# Altium PCB Drone BLDC CNTR V2.PcbDoc
Units mil, origin at the board's own origin, x right, y up, seen from the top; angles counter-clockwise.
Board outline 2830.85 x 3035 mil, 2 copper layers (Top Layer, Bottom Layer); 54 components, 37 nets, 154 pads, 328 vias.
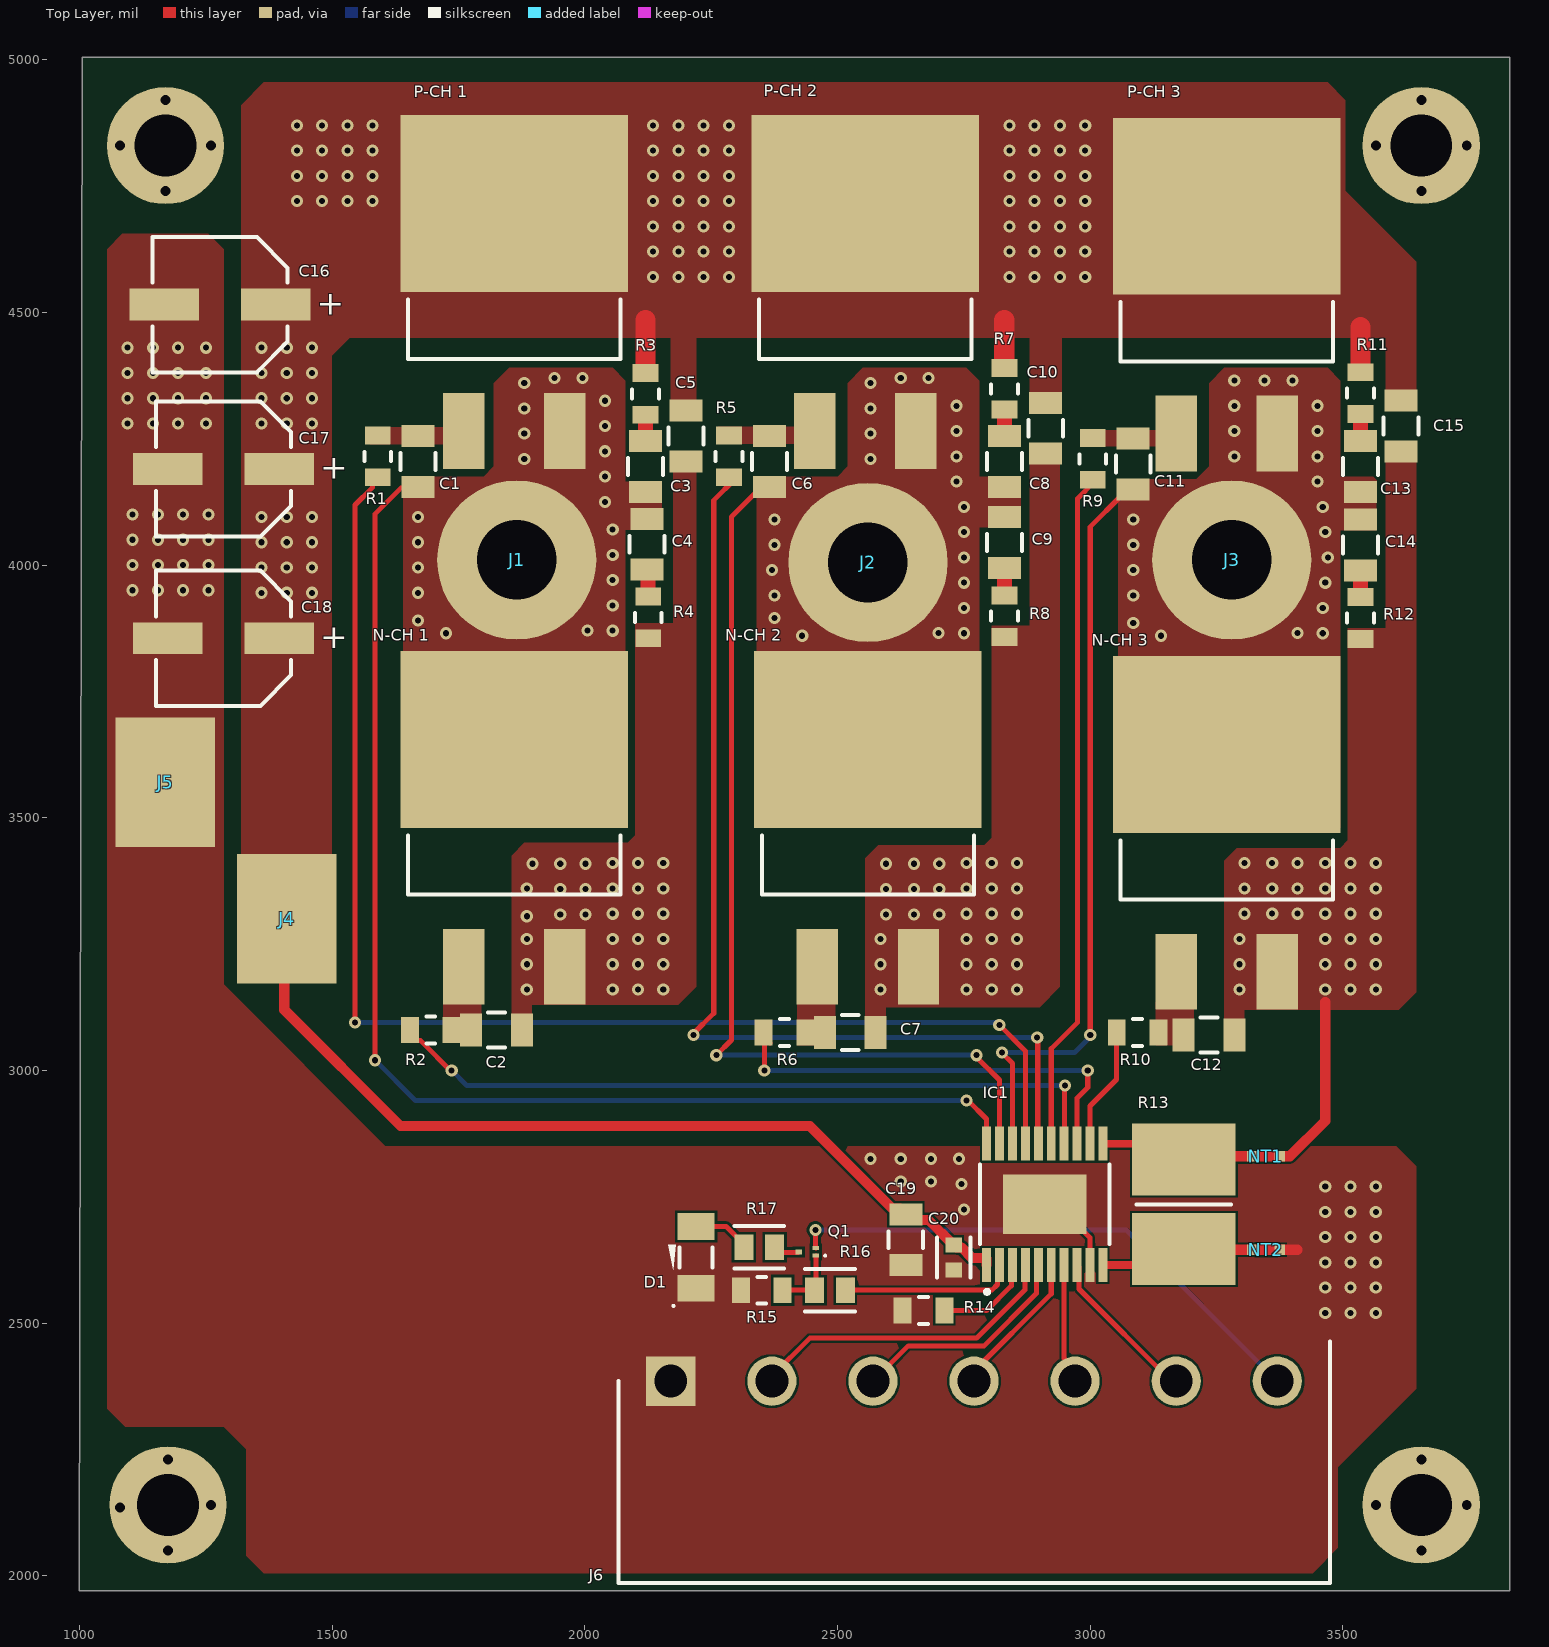
[diagram p0: Top Layer view]
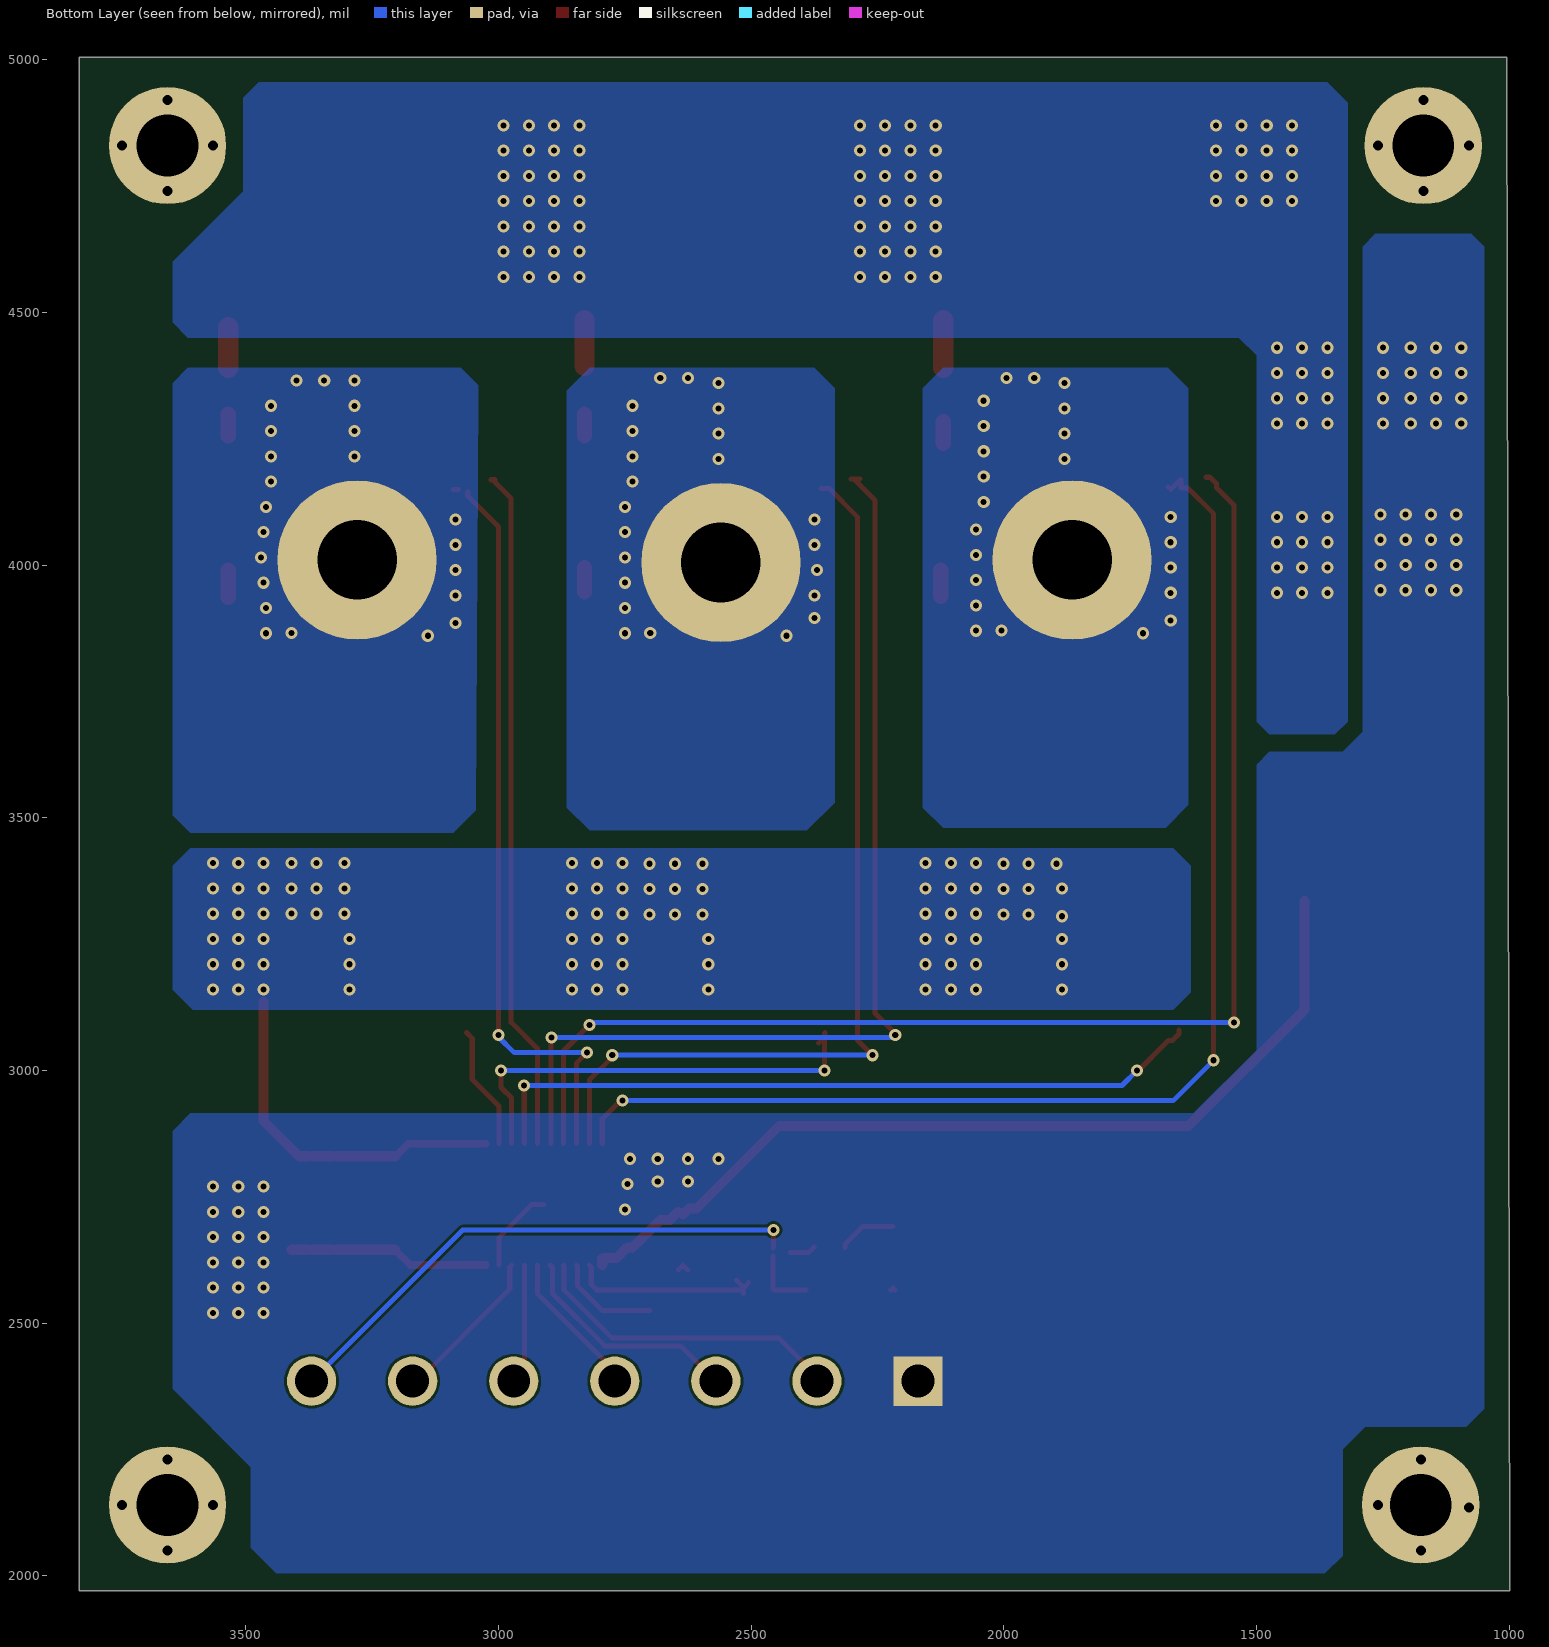
[diagram p1: Bottom Layer view, seen from below]
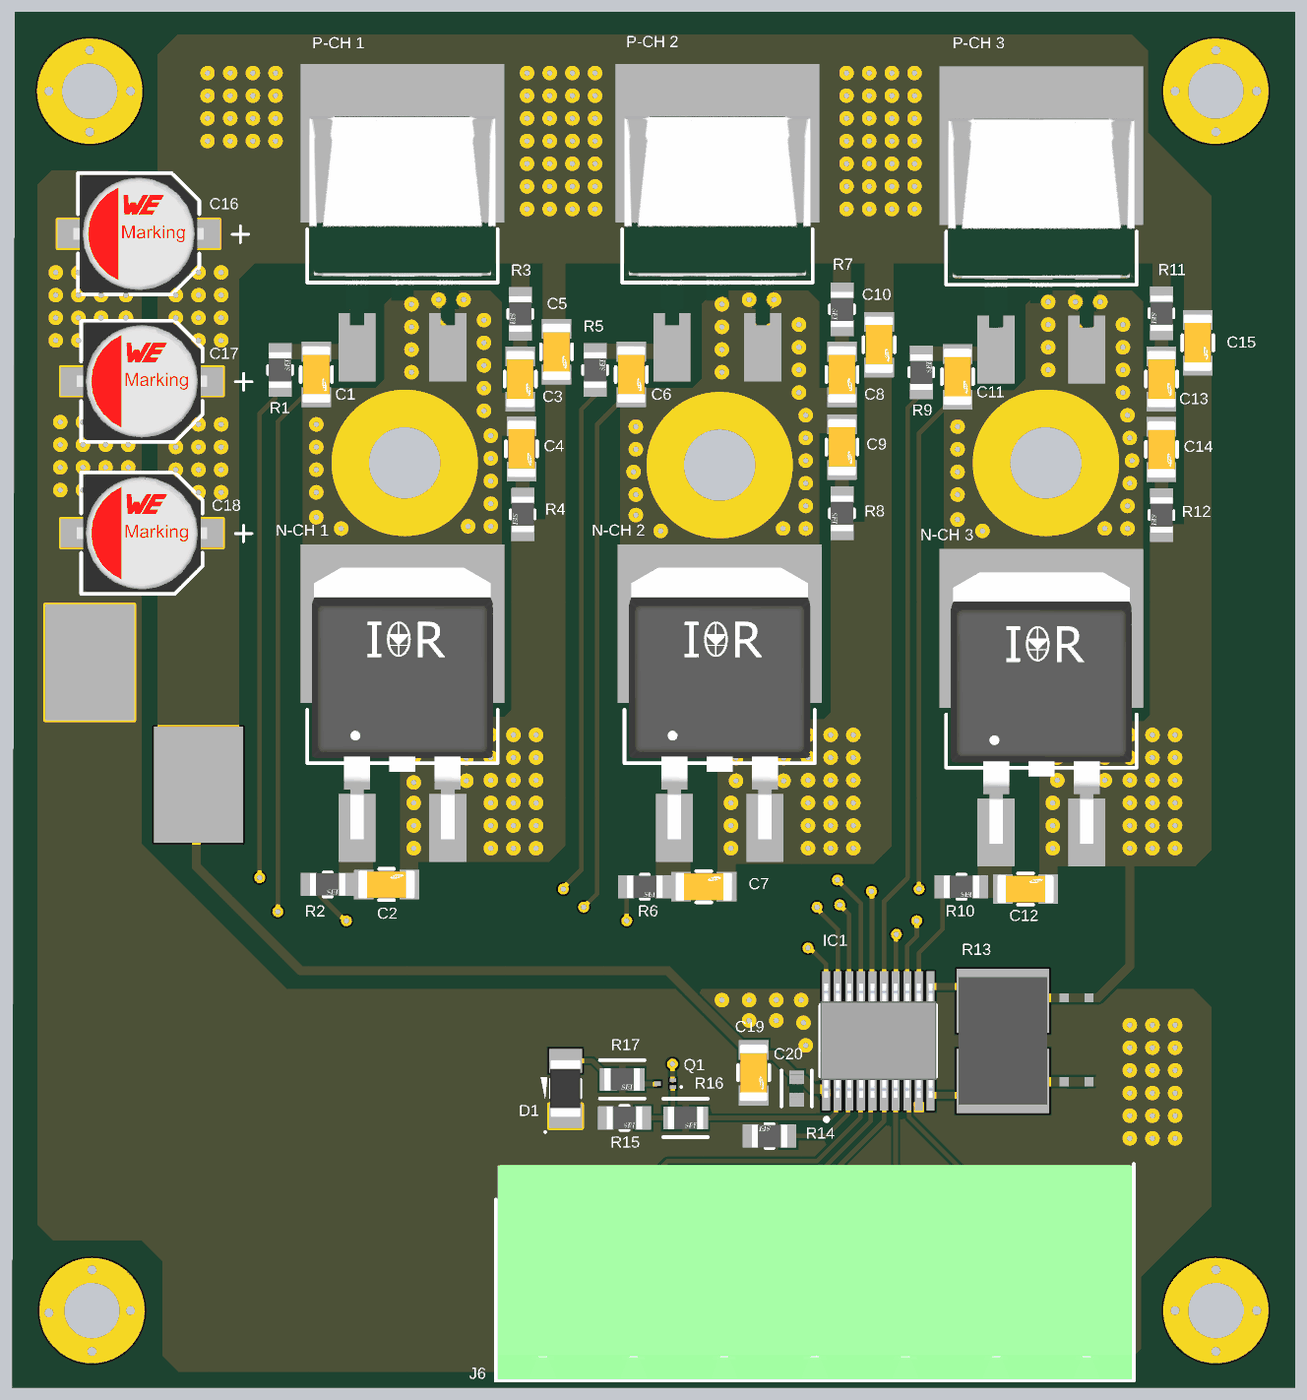
[diagram p2: 3D render of the assembled board from above, using the file's embedded part models]

## Layer stack, top to bottom
Top Solder: solder mask 0.4, Solder Resist, Dk 3.5
Top Layer: signal copper 2.7559
Dielectric 1: dielectric 12.6, FR-4, Dk 4.8
Bottom Layer: signal copper 2.7559
Bottom Solder: solder mask 0.4, Solder Resist, Dk 3.5

## Board outline
1005,5005 3830,5005 3830,1970 999.15,1970

## Design rules (kind name [scope] priority, off if disabled: settings)
Clearance Clearance_1 [All] p1: gap=5 ignorepadtopadclearanceinfootprint=TRUE
Clearance [InNet('SOURCE_LOW') vs InNet('CS_P')] p2: gap=0 ignorepadtopadclearanceinfootprint=TRUE
ComponentClearance [All] p1: gap=1.5 collisioncheckmode=3 verticalgap=10 showdistances=FALSE
DiffPairsRouting [All] p1: maxlimit=10 minlimit=10 mostfreqgap=10 toplayer_minwidth=15 toplayer_maxwidth=20 toplayer_prefwidth=15 bottomlayer_minwidth=15 bottomlayer_maxwidth=20 bottomlayer_prefwidth=15 maxuncoupledlength=500
HoleSize [All] p1: absolutevalues=TRUE maxlimit=160 minlimit=1 maxpercent=80.000 minpercent=20.000
PolygonConnect [All] p1: connectstyle=Direct reliefconductorwidth=10 reliefentries=4 polygonreliefangle="90 Angle" airgapwidth=10
RoutingVias [All] p1: holewidth=28 width=50 viastyle="Through Hole" minholewidth=12 minwidth=24 maxholewidth=157.48 maxwidth=393.7
ShortCircuit [InNet('CS_N') vs InNet('GND')] p1: allowed=TRUE
ShortCircuit ShortCircuit_1 [InNet('SOURCE_LOW') vs InNet('CS_P')] p2: allowed=TRUE
ShortCircuit ShortCircuit_2 [All] p3: allowed=FALSE
SilkToSolderMaskClearance [All] p1: minsilkscreentomaskgap=0 clearancetoexposedcopper=TRUE
SolderMaskExpansion [All] p1: expansion=4 istentingtop=FALSE
SupplyNets "Schematic Supply Nets" [InNet('VDD +5V')] p1: voltage=0.000
SupplyNets "Schematic Supply Nets_2" [InNet('GND')] p2: voltage=0.000
SupplyNets "Schematic Supply Nets_1" [InNet('VBB +22V2')] p3: voltage=0.000
Width [All] p1: maxlimit=40 minlimit=10 preferedwidth=10
25 further rules are at their usual default settings.

## Classes and differential pairs
differential pair CS: +CS_P -CS_N

## Components (designator, comment, footprint, x,y, rotation, side; value= is the part's Value field where it differs from the comment)
C1 "100nF" FP-CL31-IPC_C 1670,4205 r270 top
C2 "100nF" FP-CL31-IPC_C 1825,3080 r0 top
C3 "Placeholder" FP-CL31-IPC_C 2120,4195 r270 top
C4 "Placeholder" FP-CL31-IPC_C 2122.82,4040.95 r270 top
C5 "100nF" FP-CL31-IPC_C 2200,4255 r270 top
C6 "100nF" FP-CL31-IPC_C 2365,4205 r270 top
C7 "100nF" FP-CL31-IPC_C 2525,3075 r0 top
C8 "Placeholder" FP-CL31-IPC_C 2830,4205 r270 top
C9 "Placeholder" FP-CL31-IPC_C 2830,4044.75 r270 top
C10 "100nF" FP-CL31-IPC_C 2911.85,4270.61 r270 top
C11 "100nF" FP-CL31-IPC_C 3085,4200 r270 top
C12 "100nF" FP-CL31-IPC_C 3235,3070 r0 top
C13 "Placeholder" FP-CL31-IPC_C 3535,4195 r270 top
C14 "Placeholder" FP-CL31-IPC_C 3535,4039.75 r270 top
C15 "100nF" FP-CL31-IPC_C 3615,4275 r270 top
C16 "390uF" WCAP-ASLI_D6.3H5.5 1278.02,4515.24 r0 top
C17 "390uF" WCAP-ASLI_D6.3H5.5 1285,4190 r0 top
C18 "390uF" WCAP-ASLI_D6.3H5.5 1285,3855 r0 top
C19 "100nF" FP-CL31-IPC_C 2635,2664.75 r270 top
C20 "10uF" FP-CL10-IPC_C 2730,2630 r270 top
D1 "150120GS75000" 150120GS75000 2220,2630 r90 top
IC1 "A4963GLPTR-T" A4405KLPTRT 2910,2735 r90 top
J1 "1PAD" 1PAD 1865,4010 r0 top
J2 "1PAD" 1PAD 2560,4005 r0 top
J3 "1PAD" 1PAD 3280,4010 r0 top
J4 "1PADREC" 1PADREC 1410,3300 r270 top
J5 "1PADREC" 1PADREC 1170,3570 r270 top
J6 "1759062" SHDRRA7W103P0X508_1X7_3556X1200X872P 2170,2385 r180 top
"N-CH 1" "IRF540NSTRLPBF" FP-PG-TO263-3-MFG#1 1860.08,3480 r0 top
"N-CH 2" "IRF540NSTRLPBF" FP-PG-TO263-3-MFG#1 2560,3480 r0 top
"N-CH 3" "IRF540NSTRLPBF" FP-PG-TO263-3-MFG#1 3270,3470 r0 top
NT1 "NET_TIE" NET_TIE 3345,2830 r90 top
NT2 "NET_TIE" NET_TIE 3345,2645 r90 top
"P-CH 1" "IRF5305STRLPBF" FP-PG-TO263-3-MFG#2 1860,4597.68 r0 top
"P-CH 2" "IRF5305STRLPBF" FP-PG-TO263-3-MFG#2 2555,4597.68 r0 top
"P-CH 3" "IRF5305STRLPBF" FP-PG-TO263-3-MFG#2 3270,4592.68 r0 top
Q1 "NST3906F3T5G" ONSC-SOT-1123-3-524AA_V 2440.09,2640.74 r180 top
R1 "200Ω" FP-RMCF0805-MFG 1590,4215 r90 top
R2 "200Ω" FP-RMCF0805-MFG 1695,3080 r0 top
R3 "Placeholder" FP-RMCF0805-MFG 2120,4338.66 r270 top
R4 "Placeholder" FP-RMCF0805-MFG 2125.45,3896.43 r270 top
R5 "200Ω" FP-RMCF0805-MFG 2285,4215 r90 top
R6 "200Ω" FP-RMCF0805-MFG 2395,3075 r0 top
R7 "Placeholder" FP-RMCF0805-MFG 2830,4348.66 r270 top
R8 "Placeholder" FP-RMCF0805-MFG 2830,3898.66 r270 top
R9 "200Ω" FP-RMCF0805-MFG 3005,4210 r90 top
R10 "200Ω" FP-RMCF0805-MFG 3093.66,3075 r0 top
R11 "Placeholder" FP-RMCF0805-MFG 3535,4340 r270 top
R12 "Placeholder" FP-RMCF0805-MFG 3535,3895 r270 top
R13 "10mΩ" RESC7250X190N 3185,2735 r90 top
R14 "10kΩ" FP-RMCF0805-MFG 2670,2525 r180 top
R15 "10kΩ" FP-RMCF0805-MFG 2350,2565 r0 top
R16 "1kΩ" FP-RMCF0805-IPC_C 2485,2565 r0 top
R17 "1.6kΩ" FP-RMCF0805-IPC_C 2345,2650 r0 top

## Footprints (in the part's own frame and the unit in brackets; to place one, negate y for a bottom-side part, rotate by r counter-clockwise, add the part's x,y. Pads: shape width x height; smd on the part's side, far side on the other; paste and mask are expansions set on the pad)
1PAD [mm] "1 Pad Connector"
  round 8 hole 4: 1(0,0)
1PADREC [mm] "1 Pad Rectangular Connector"
  rect 6.5x5 smd: 1(0,0)
150120GS75000 [mm] "Chip Diode, 2-Leads, Body 3.20x1.60mm, IPC Low Density"
  rect 1.35x1.85 smd: 1(-1.55,0) 2(1.55,0)
  silkscreen extent -2.49,-0.82 0.63,1.4, body extent -1.6,-0.85 1.6,0.85, height 0.78
A4405KLPTRT [mm]
  rect 1.7x0.45 smd: 1(-3.05,2.925) 2(-3.05,2.275) 3(-3.05,1.625) 4(-3.05,0.975) 5(-3.05,0.325) 6(-3.05,-0.325) 7(-3.05,-0.975) 8(-3.05,-1.625) 9(-3.05,-2.275) 10(-3.05,-2.925) 11(3.05,-2.925) 12(3.05,-2.275) 13(3.05,-1.625) 14(3.05,-0.975) 15(3.05,-0.325) 16(3.05,0.325) 17(3.05,0.975) 18(3.05,1.625) 19(3.05,2.275) 20(3.05,2.925)
  rect 3x4.2 smd: 21(0,0)
  silkscreen extent -4.5,-3.25 2,3.25, body extent -3.19,-3.31 3.21,3.29, height 1.04
FP-CL10-IPC_C [mil]
  rect 29.85x31.97 smd paste+0 mask+0: 1(-24.68,0) 2(24.68,0)
  silkscreen extent -40,-33 40,33, body extent -44,-22 44,22, height 10
FP-CL31-IPC_C [mil]
  rect 43.52x65.28 smd paste+0 mask+0: 1(-50.25,0) 2(50.25,0)
  silkscreen extent -17,-34 17,34, body extent -76,-38 76,38, height 10
FP-PG-TO263-3-MFG#1 [mm]
  rect 2.08x3.81 smd paste+0 mask+0: 1(-2.54,-6.985) 3(2.54,-6.985)
  rect 11.43x8.89 smd paste+0 mask+0: 4(0,4.445)
  silkscreen extent -5.34,-3.36 5.34,-0.38, body extent -5.81,-8.99 5.81,8.99, height 0.25
FP-PG-TO263-3-MFG#2 [mm]
  rect 2.08x3.81 smd paste+0 mask+0: 1(-2.54,-8.45) 3(2.54,-8.45)
  rect 11.43x8.89 smd paste+0 mask+0: 4(0,2.98)
  silkscreen extent -5.34,-4.82 5.34,-1.84, body extent -5.81,-10.46 5.81,7.52, height 0.25
FP-RMCF0805-IPC_C [mil]
  rect 37.58x49.69 smd paste+0 mask+0: 1(-30.54,0) 2(30.54,0)
  silkscreen extent -49,-42 49,42, body extent -53,-31 53,31, height 10
FP-RMCF0805-MFG [mm]
  rect 0.9x1.3 smd paste+0 mask+0: 1(-1.05,0) 2(1.05,0)
  silkscreen extent -0.23,-0.67 0.23,0.67, body extent -1.6,-0.77 1.6,0.77, height 0.25
NET_TIE [mil]
  rect 20x20 smd mask-99999: 1(0,-30) 2(0,25)
  Top Layer region: -10,-25 10,-25 10,19.88 -10,19.88
ONSC-SOT-1123-3-524AA_V [mm] "SOT223, 3-Leads, Body 0.8x0.6mm, Pitch 0.38mm"
  rect 0.34x0.2 smd: 1(-0.43,0.19) 2(-0.43,-0.19)
  rect 0.34x0.26 smd: 3(0.43,0)
  silkscreen extent -0.95,0.14 -0.85,0.24, body extent -0.4,-0.3 0.4,0.3, height 0.4
RESC7250X190N [mm]
  rect 3.6x5.2 smd: 1(-2.25,0) 2(2.25,0)
  silkscreen extent 0,-2.37 0,2.37, body extent -3.57,-2.47 3.58,2.48, height 1.65
SHDRRA7W103P0X508_1X7_3556X1200X872P [mm]
  rect 2.475x2.475 hole 1.65: 1(0,0)
  round 2.475 hole 1.65: 2(-5.08,0) 3(-10.16,0) 4(-15.24,0) 5(-20.32,0) 6(-25.4,0) 7(-30.48,0)
  silkscreen extent -33.12,-2 2.64,10.15, body extent -33.02,-1.92 2.54,10.08, height 9.25
WCAP-ASLI_D6.3H5.5 [mm] "Aluminium Electrolytic V-Chip SMT Capacitors, 6.3x5.5mm"
  rect 3.5x1.6 smd: 1(2.8,0) 2(-2.8,0)
  silkscreen extent -3.4,-3.4 3.4,3.4, body extent -3.65,-3.3 3.65,3.3, height 5.5

## Part data
C1 C2 C5 C6 C7 C10 C11 C12 C15 C19: library part CMP-13271-001731-1, "Cap Ceramic 100nF 50V X7R ±10% SMD 1206 +125°C Embossed T/R", Case/Package=1206, Dielectric=X7R, Max Operating Temperature=125°C, Min Operating Temperature=-55°C, Package Quantity=15000, Tolerance=10%, Voltage=50V, Capacitance=100nF, Depth=1.6mm, Height=0.85mm, Lead Free="Lead Free", Length=3.2mm, Mount="Surface Mount", Packaging="Tape and Reel", Radiation Hardening=No, Thickness=0.037inch, Voltage Rating=50V, Voltage Rating (DC)=50V, Width=0.063inch
C3 C4 C8 C9 C13 C14: library part CMP-13271-001731-1, "Cap Ceramic 100nF 50V X7R ±10% SMD 1206 +125°C Embossed T/R", Capacitance=100nF, Case/Package=1206, Dielectric=X7R, Max Operating Temperature=125°C, Min Operating Temperature=-55°C, Package Quantity=15000, Tolerance=10%, Voltage=50V, Depth=1.6mm, Height=0.85mm, Lead Free="Lead Free", Length=3.2mm, Mount="Surface Mount", Packaging="Tape and Reel", Radiation Hardening=No, Thickness=0.037inch, Voltage Rating=50V, Voltage Rating (DC)=50V, Width=0.063inch
C16 C17 C18: library part CMP-03913-53914574-1, "865080343009 WCAP-ASLI Aluminum Electrolytic Capacitors", Capacitance=100µF, Case/Package=Radial, ESR (Equivalent Series Resistance)=399.422mΩ, Insulation Resistance=1MΩ, Leakage Current=16µA, Max Operating Temperature=105°C, Min Operating Temperature=-55°C, Ripple Current=255mA, Tolerance=20%, Voltage Rating=16V, Diameter=6.3mm, Height=5.5mm, Height - Seated (Max)=5.5118mm, Impedance=520mΩ, Lead Free="Lead Free", Length=5.5mm, Life (Hours)=2000hours, Mount="Surface Mount", NexarPartId=53914574, Packaging="Tape & Reel (TR)", Polarity=Polar, REACH SVHC=Unknown, Ripple Current (AC)=255mA, RoHS=Compliant, Voltage Rating (DC)=16V, Width=6.6mm
C20: library part CMP-13271-000193-1, "Cap Ceramic 10nF 50V X7R ±20% Pad SMD 0603 +125°C T/R", Capacitance=10nF, Case Code (Imperial)=0603, Case Code (Metric)=1608, Dielectric=X7R, Max Operating Temperature=125°C, Min Operating Temperature=-55°C, Package Quantity=4000, Tolerance=20%, Voltage Rating=50V, Case/Package=0603, Depth=0.8mm, Height=0.8mm, Lead Free="Lead Free", Length=1.6mm, Mount="Surface Mount", Packaging="Tape and Reel", Radiation Hardening=No, Thickness=0.035inch, Voltage Rating (DC)=50V, Width=0.031inch
D1: library part CMP-036-000001-1, "Green Status LED 1206", ComponentLink1Description=Schematic, ComponentLink1URL=https://katalog.we-online.de/led/datasheet/150120GS75000.pdf, Design Item ID=150120GS75000, Source="LED - Chip.SchLib"
IC1: "Integrated Circuit", Manufacturer_Name="Allegro Microsystems", Mouser Part Number=250-A4963GLPTR-T, Arrow Part Number=A4963GLPTR-T, Arrow Price/Stock=https://www.arrow.com/en/products/a4963glptr-t/allegro-microsystems?region=nac, Datasheet Link=https://www.allegromicro.com/~/media/Files/Datasheets/A4963-Datasheet.ashx, Height=1.2mm, Manufacturer_Part_Number=A4963GLPTR-T, Mouser Price/Stock=https://www.mouser.co.uk/ProductDetail/Allegro-MicroSystems/A4963GLPTR-T?qs=pUKx8fyJudBsbRJaBUG8MA%3D%3D
J1 J2 J3: "1 Pad Connector"
J4 J5: "1 Pad Rectangular Connector"
J6: "Connector", Manufacturer_Name="Phoenix Contact", Mouser Part Number=651-1759062, Arrow Part Number=1759062, Arrow Price/Stock=https://www.arrow.com/en/products/1759062/phoenix-contact, Datasheet Link=http://www.phoenixcontact.com/de/produkte/1759062/pdf, Height=8.72mm, Manufacturer_Part_Number=1759062, Mouser Price/Stock=https://www.mouser.co.uk/ProductDetail/Phoenix-Contact/1759062?qs=cyzODkzcbwDJuRBXr3zqQw%3D%3D
"N-CH 1" "N-CH 2" "N-CH 3": library part CMP-00196-65873407-1, "IRF540NSTRLPBF Transistor MOSFET N Channel 100 Volt 33 Amp 3-Pin 2+ Tab D2pak Tape And Reel", Case/Package=D2PAK, Continuous Drain Current (ID)=33A, Drain to Source Breakdown Voltage=100V, Drain to Source Resistance=44mΩ, Gate to Source Voltage (Vgs)=20V, Input Capacitance=1.96nF, Max Junction Temperature (Tj)=175°C, Max Power Dissipation=3.8W, Min Operating Temperature=-55°C, Package Quantity=800, Resistance=44MΩ, Threshold Voltage=4V, Contact Plating=Tin, Current Rating=33A, Drain to Source Voltage (Vdss)=100V, Dual Supply Voltage=100V, Element Configuration=Single, Fall Time=35ns, Height=4.826mm, Lead Free="Lead Free", Length=10.668mm, Lifecycle Status=NRND, Max Operating Temperature=175°C, Mount="Surface Mount", NexarPartId=65873407, Nominal Vgs=4V, Number Of Channels=1, Number of Elements=1, Number of Pins=3, On-State Resistance=44mΩ, Packaging=Bulk, Power Dissipation=3.8W, Radiation Hardening=No, Rds On Max=8.4mΩ, REACH SVHC="No SVHC", Recovery Time=170ns, Rise Time=35ns, RoHS=Compliant, Schedule B="8541290080, 8541290080", Termination=SMD/SMT, Turn-Off Delay Time=39ns, Turn-On Delay Time=11ns, Voltage Rating (DC)=100V, Width=9.65mm
NT1 NT2: "Net Tie Pad"
"P-CH 1" "P-CH 2" "P-CH 3": library part CMP-32901-000146-1, "MOSFET P-CH 55V 31A D2PAK", Continuous Drain Current=-31A, Drain to Source Breakdown Voltage=-55V, Drain to Source Resistance=0.06Ω, Gate To Source Voltage=20V, Input Capacitace At Vds="1200pF @ -25V", Manufacturer="Infineon Technologies", Max Forward Diode Voltage=-1.3V, Max Junction Temp=+175°C, Package=PG-TO263-3, Power Dissipation=3.8W, Pulse Drain Current=-110A, Temperature="-55°C to +175°C", Temperature Range Low=-55°C, Automotive=No, Category=Trans, ComponentLink2Description=Datasheet, ComponentLink2URL=https://www.infineon.com/dgdl/irf5305spbf.pdf?fileId=5546d462533600a4015355e378101995, Depletion Mode=False, Device Class L1="Discrete Semiconductors", Device Class L2=Transistors, Device Class L3=MOSFETs, Digikey Description="MOSFET P-CH 55V 31A D2PAK", Drain To Source Voltage=-55V, Gate Charge At Vgs="63nC @ -10V", Height=5.084mm, Lead Free=Yes, Manufacturer Part Number=IRF5305STRLPBF, Number Of Channels=1, Number Of P Channels=1, Octopart=https://octopart.com/irf5305strlpbf-infineon-65873398, Reverse Recovery Charge=170nC, Reverse Recovery Time=71ns, RoHS=TRUE, Rthja Max=40°C/W, Standoff Height=0mm, Temperature Range High=+175°C, Threshold Vgs Max=-4V, Threshold Vgs Min=-2V, Turn Off Delay Time=39ns, Turn On Delay Time=14ns
Q1: library part CMP-1048-00442-1, "PNP General Purpose Transistor, 3-Pin SOT-1123, Pb-Free, Tape and Reel", Manufacturer="On Semiconductor", ComponentLink1Description="Manufacturer URL", ComponentLink1URL=http://www.onsemi.com/, ComponentLink2Description=Datasheet, ComponentLink2URL=http://www.onsemi.com/pub_link/Collateral/NST3906F3-D.PDF, ComponentLink3Description="Package Specification", ComponentLink3URL=http://www.onsemi.cn/pub_link/Collateral/524AA.PDF, DatasheetVersion="Rev. 1", fT Min (MHz)=250, IC Continuous (A)=-0.2, Mounting Technology="Surface Mount", PackageDescription="3-Pin Small Outline Transistor, Body 0.8 x 0.6 mm, Pitch 0.375 mm", PackageReference=SOT-1123-3-524AA, PackageVersion="Rev. C, 11/2011", Packing="Tape and Reel", PartNumber=NST3906F3T5G, Polarity=PNP, RoHS=TRUE
R1 R2 R3 R4 R5 R6 R7 R8 R9 R10 R11 R12 R14: library part CMP-26527-000524-1, "200Ω ±1% 0.125W 0805 Thick Film Chip Resistor AEC-Q200 compliant", Case Code (Imperial)=0805, Case Code (Metric)=2012, Max Operating Temperature=155°C, Max Power Dissipation=125mW, Min Operating Temperature=-55°C, Resistance=200R, Resistor Type="Thick Film", Temperature Coefficient=100ppm/°C, Tolerance=1%, Case/Package=0805, Construction=Rectangular, Contact Plating=Tin, Depth=1.25mm, Features="Automotive AEC-Q200", Height=0.026inch, Lead Free="Lead Free", Length=0.079inch, Military Standard=Not, Mount="Surface Mount", Number of Terminations=2, Packaging="Tape and Reel", Power Rating=125mW, Radiation Hardening=No, RoHS Compliant=Yes, Series=RMCF, Size Code=0805, Width=0.049inch
R13: library part HCSM2818FT10L0, "10mΩ 5W Resistor", Manufacturer_Name="Stackpole Electronics", Arrow Part Number=HCSM2818FT10L0, Arrow Price/Stock=https://www.arrow.com/en/products/hcsm2818ft10l0/stackpole-electronics, Datasheet Link=https://cs.seielect.com/catalog/SEI-HCSM.pdf, Height=1.9mm, Manufacturer_Part_Number=HCSM2818FT10L0
R15: library part CMP-26527-000121-1, "RES 10K OHM 1% 1/8W 0805", Case Code (Imperial)=0805, Case Code (Metric)=2012, Max Operating Temperature=155°C, Max Power Dissipation=125mW, Min Operating Temperature=-55°C, Resistance=10kR, Resistor Type="Thick Film", Temperature Coefficient=100ppm/°C, Tolerance=1%, Case/Package=0805, Construction=Rectangular, Contact Plating=Tin, Depth=1.25mm, Features="Automotive AEC-Q200", Height=0.026inch, Lead Free="Lead Free", Length=2mm, Military Standard=Not, Mount="Surface Mount", Number of Terminations=2, Packaging="Tape and Reel", Power Rating=125mW, Radiation Hardening=No, RoHS Compliant=Yes, Series=RMCF, Size Code=0805, Width=0.049inch
R16: library part CMP-26527-002331-1, "1kΩ ±1% 0.125W 0805 Thick Film Chip Resistor AEC-Q200 compliant", Case Code (Imperial)=0805, Case Code (Metric)=2012, Max Operating Temperature=155°C, Max Power Dissipation=125mW, Min Operating Temperature=-55°C, Resistance=1kR, Resistor Type="Thick Film", Temperature Coefficient=100ppm/°C, Tolerance=1%, Case/Package=0805, Construction=Rectangular, Contact Plating=Tin, Depth=1.25mm, Features="Automotive AEC-Q200", Height=0.026inch, Lead Free="Lead Free", Length=2mm, Military Standard=Not, Mount="Surface Mount", Number of Terminations=2, Packaging="Tape and Reel", Power Rating=125mW, Radiation Hardening=No, RoHS Compliant=Yes, Series=RMCF, Size Code=0805, Width=0.049inch
R17: library part CMP-26527-000088-1, "2.2kΩ ±5% 0.125W 0805 Thick Film Chip Resistor AEC-Q200 compliant", Case Code (Imperial)=0805, Case Code (Metric)=2012, Max Operating Temperature=155°C, Max Power Dissipation=125mW, Min Operating Temperature=-55°C, Resistance=2.2kR, Resistor Type="Thick Film", Temperature Coefficient=100ppm/°C, Tolerance=5%, Case/Package=0805, Construction=Rectangular, Contact Plating=Tin, Depth=1.25mm, Features="Automotive AEC-Q200", Height=0.026inch, Lead Free="Lead Free", Length=2mm, Military Standard=Not, Mount="Surface Mount", Number of Terminations=2, Packaging="Tape and Reel", Power Rating=125mW, Radiation Hardening=No, RoHS Compliant=Yes, Series=RMCF, Size Code=0805, Width=0.049inch

## Free pads (board coordinates)
  round 27.56 hole 19.68: ""(1080,2135) ""(1080,4830) ""(1170,4740) ""(1170,4920) ""(1175,2050) ""(1175,2230) ""(1260,2140) ""(1260,4830) ""(3565,2140) ""(3565,4830) ""(3655,2050) ""(3655,2230) ""(3655,4740) ""(3655,4920) ""(3745,2140) ""(3745,4830)
  round 232.28 hole 122.05: ""(1170,4830) ""(1175,2140) ""(3655,2140) ""(3655,4830)

## Via types
v1: diameter 24, hole 12, Top Layer to Bottom Layer, 328 vias

## Nets (pads, with @x,y where several pads share a name; then routed paths per layer and width w, separated by ;. In a path a pad name is that pad's centre, name@x,y a point inside that pad or via, vN(x,y) a via of type N, cw(c..) or ccw(c..) an arc to the next point about the centre after c; other vN are vias at no path point)
CS_N: IC1.10 NT2.2 R13.1 | length 307.3
  Top Layer w15: IC1.10 3174.92,2614.92 R13.1@3205,2645
  Top Layer w20: R13.1@3205,2645 NT2.2
CS_P: IC1.11 NT1.2 R13.2 | length 305.2
  Top Layer w15: IC1.11 3178.5,2855.08 R13.2@3203.58,2830
  Top Layer w20: R13.2@3203.58,2830 NT1.2
FAULTN: IC1.2 R16.2 | length 394.3
  Top Layer w10: R16.2@2505,2580 R16.2@2515.54,2569.46 ; R16.2@2515.54,2558.95 R16.2 R16.2@2515.54,2569.46 ; R16.2@2529.33,2584.85 2515.54,2571.05 R16.2@2515.54,2569.46 ; IC1.2 2816.57,2611.06 2816.57,2576.24 2805.33,2565 2520,2565 R16.2@2515.54,2569.46
GHA: IC1.17 R1.1 | length 2639.4
  Top Layer w10: v1(1545,3095) 1545,4118.66 1579.41,4153.07 1579.41,4160.94 1592.13,4173.66 R1.1@1600,4173.66 ; v1(2820,3090) 2871.61,3038.39 IC1.17
  Bottom Layer w10: v1(1545,3095) 2811.21,3095 2816.21,3090 v1(2820,3090)
GHB: IC1.16 R5.1 | length 2044
  Top Layer w10: v1(2215,3070) 2215,3072.8 2255,3112.8 2255,4127.87 R5.1@2297.13,4170 ; R5.1@2285,4170 R5.1@2297.13,4170 ; R5.1@2302.13,4170 R5.1@2297.13,4170 ; v1(2895,3065) 2896.1,3063.9 2896.1,2856.18 IC1.16
  Bottom Layer w10: v1(2215,3070) 2218.79,3070 2223.79,3065 v1(2895,3065)
GHC: IC1.15 R9.1 | length 1351.4
  Top Layer w10: IC1.15 2922.8,3042.8 2975,3095 2975,4131.54 R9.1@3007.13,4163.66 ; R9.1@3007.13,4168.66 R9.1@3015,4168.66
GLA: IC1.14 R2.1 | length 1466.4
  Top Layer w10: R2.1 1653.66,3072.13 1666.38,3059.41 1674.25,3059.41 v1@1738.66,2995 ; IC1.14 2949.19,2855.89 2949.19,2969.19 v1(2950,2970)
  Bottom Layer w10: v1(1736.44,3000) 1766.44,2970 v1(2950,2970)
GLB: IC1.13 R6.1 | length 895
  Top Layer w10: v1(2355,3000) 2355,3073.66 R6.1 2353.66,3067.13 R6.1@2366.38,3054.41 ; IC1.13 2973.98,2945.19 2995,2966.21 v1(2995,3000)
  Bottom Layer w10: v1(2355,3000) v1(2995,3000)
GLC: IC1.12 R10.1 | length 246.5
  Top Layer w10: IC1.12 2999.57,2929.57 3052.07,2982.07 3052.07,3063.41 R10.1@3063.66,3075
GND: C16.2 C17.2 C18.2 C19.2 C20.2 D1.1 IC1.9 IC1.21 J5.1 J6.1 NT2.1 R14.2 R15.1 | length 243.7
  Top Layer w10: D1.1@2216.02,2565 D1.1 D1.1@2223.98,2565 ; C19.2@2625.5,2605 C19.2 C19.2@2644.18,2605.32 ; IC1.21 2933.62,2735 2999.57,2669.06 IC1.9
  Top Layer w20: NT2.1 3410,2645
  other v1: 3465,2520 3515,2520 3565,2520 3465,2570 3515,2570 3565,2570 3465,2620 3515,2620 3565,2620 3465,2670 3515,2670 3565,2670 3465,2720 3515,2720 3565,2720 2750,2725 3465,2770 3515,2770 3565,2770 2745,2775 2625,2780 2685,2780 2565,2825 2625,2825 2685,2825 2740,2825 1105,3950 1155,3950 1205,3950 1255,3950 1105,4000 1155,4000 1205,4000 1255,4000 1105,4050 1155,4050 1205,4050 1255,4050 1105,4100 1155,4100 1205,4100 1255,4100 1095,4280 1145,4280 1195,4280 1250,4280 1095,4330 1145,4330 1195,4330 1250,4330 1095,4380 1145,4380 1195,4380 1250,4380 1095,4430 1145,4430 1195,4430 1250,4430
NetC1_1: "P-CH 1.1" C1.1 R1.2
NetC2_1: "N-CH 1.1" C2.1 R2.2
NetC3_1: C3.1 R3.2 | length 43.4
  Top Layer w30: C3.1@2120,4240.25 R3.2@2120,4283.66
NetC4_2: C4.2 R4.1 | length 52
  Top Layer w30: R4.1@2125,3937.76 C4.2@2125,3989.75
NetC6_1: "P-CH 2.1" C6.1 R5.2
NetC7_1: "N-CH 2.1" C7.1 R6.2
NetC8_1: C8.1 R7.2 | length 43.4
  Top Layer w30: C8.1 R7.2@2830,4298.66
NetC9_2: C9.2 R8.1 | length 48.2
  Top Layer w30: R8.1@2830,3946.34 C9.2
NetC11_1: "P-CH 3.1" C11.1 R9.2
NetC12_1: "N-CH 3.1" C12.1 R10.2
NetC13_1: C13.1 R11.2 | length 43.4
  Top Layer w30: C13.1@3535,4255.25 R11.2
NetC14_2: C14.2 R12.1 | length 53.2
  Top Layer w30: R12.1 C14.2
NetD1_2: D1.2 R17.1 | length 115
  Top Layer w10: D1.2 2279.49,2691.02 2314.46,2656.05 R17.1
NetQ1_1: Q1.1 R15.2 R16.1 | length 131.7
  Top Layer w10: R15.2 R16.1 2456.93,2567.47 Q1.1@2456.93,2632.52
NetQ1_3: Q1.3 R17.2 | length 51.7
  Top Layer w10: R17.2 2385.54,2640 Q1.3@2423.07,2640
PWM: IC1.4 J6.2 | length 631
  Top Layer w10: J6.2 2370,2395 2445,2470 2775,2470 2870.81,2565.81 2870.81,2614.11 IC1.4
SA: "N-CH 1.4" "P-CH 1.3" C1.2 C3.2 C4.1 IC1.20 J1.1 | length 2522.7
  Top Layer w10: v1(1585,3020) 1585,4101.21 1635.88,4152.09 1650,4152.09 1650,4169.11 C1.2@1669.68,4149.43 ; C1.2@1672.34,4152.09 C1.2@1675,4154.75 ; v1(2755,2940) 2758.79,2940 2794.84,2903.95 IC1.20
  Bottom Layer w10: v1(1585,3020) 1665,2940 v1(2755,2940)
  other v1: 1725,3865 2004.9,3870.23 2055,3870 1670,3890 2055,3920 1670,3945 2055,3970 1670,3995 2055,4020 1670,4045 2055,4070 1670,4095 2040,4125 2040,4175 1880,4210 2040,4225 1880,4260 2040,4275 1880,4310 2040,4325 1880,4360 1940,4370 1995,4370
SB: "N-CH 2.4" "P-CH 2.3" C6.2 C8.2 C9.1 IC1.19 J2.1 | length 1881.7
  Top Layer w10: v1(2260,3030) 2290,3060 2290,4095.34 2346.28,4151.62 C6.2@2361.86,4151.62 ; v1(2775,3030) 2775,3026.21 2820.43,2980.78 IC1.19
  Bottom Layer w10: v1(2260,3030) v1(2775,3030)
  other v1: 2430,3860 2699.9,3865.23 2750,3865 2375,3895 2750,3915 2375,3940 2750,3965 2370,3990 2750,4015 2375,4040 2750,4065 2375,4090 2750,4115 2735,4165 2565,4210 2735,4215 2565,4260 2735,4265 2565,4310 2735,4315 2565,4360 2625,4370 2680,4370
SC: "N-CH 3.4" "P-CH 3.3" C11.2 C13.2 C14.1 IC1.18 J3.1 | length 1491.3
  Top Layer w10: v1(2825,3035) 2846.02,3013.98 IC1.18 ; v1(3000,3070) 3000,4075.63 3061.01,4136.64 C11.2@3061.01,4144.82 ; C11.2@3079.12,4149.75 C11.2@3090,4149.75
  Bottom Layer w10: v1(2825,3035) 2968.79,3035 3000,3066.21 v1(3000,3070)
  other v1: 3140,3860 3409.9,3865.23 3460,3865 3085,3885 3460,3915 3085,3940 3465,3965 3085,3990 3470,4015 3085,4040 3465,4065 3085,4090 3460,4115 3450,4165 3285,4215 3450,4215 3285,4265 3450,4265 3285,4315 3450,4315 3285,4365 3345,4365 3400,4365
SCK: IC1.6 J6.4 | length 293.2
  Top Layer w10: J6.4 2770,2405 2922.8,2557.8 IC1.6
SDI: IC1.8 J6.6 | length 317
  Top Layer w10: IC1.8 2977.83,2611.06 2977.83,2567.17 3160,2385 J6.6
SDO: IC1.5 J6.3 | length 455.3
  Top Layer w10: J6.3 2640,2455 2790,2455 2893.35,2558.35 2893.35,2611.06 IC1.5 IC1.5@2898.6,2613.52
SOURCE_LOW: "N-CH 1.3" "N-CH 2.3" "N-CH 3.3" C2.2 C5.2 C7.2 C10.2 C12.2 C15.2 NT1.1 R4.2 R8.2 R12.2 | length 354
  Top Layer w20: NT1.1 3395,2830 3465,2900 3465,3135
  other v1: 1885,3160 2055,3160 2105,3160 2155,3160 2585,3160 2755,3160 2805,3160 2855,3160 3295,3160 3465,3160 3515,3160 3565,3160 1885,3210 2055,3210 2105,3210 2155,3210 2585,3210 2755,3210 2805,3210 2855,3210 3295,3210 3465,3210 3515,3210 3565,3210 1885,3260 2055,3260 2105,3260 2155,3260 2585,3260 2755,3260 2805,3260 2855,3260 3295,3260 3465,3260 3515,3260 3565,3260 1885,3305 1951.15,3308.78 2001.15,3308.78 2596.15,3308.78 2651.15,3308.78 2701.15,3308.78 2055,3310 2105,3310 2155,3310 2755,3310 2805,3310 2855,3310 3305,3310 3360,3310 3410,3310 3465,3310 3515,3310 3565,3310 1951.15,3358.78 2001.15,3358.78 2596.15,3358.78 2651.15,3358.78 2701.15,3358.78 1885,3360 2055,3360 2105,3360 2155,3360 2755,3360 2805,3360 2855,3360 3305,3360 3360,3360 3410,3360 3465,3360 3515,3360 3565,3360 1896.15,3408.78 1951.15,3408.78 2001.15,3408.78 2596.15,3408.78 2651.15,3408.78 2701.15,3408.78 2055,3410 2105,3410 2155,3410 2755,3410 2805,3410 2855,3410 3305,3410 3360,3410 3410,3410 3465,3410 3515,3410 3565,3410
SPD: IC1.3 R14.1 | length 206.1
  Top Layer w10: R14.1@2700,2525 2795,2525 2843.7,2573.7 2843.7,2612.6 IC1.3
STRN: IC1.7 J6.5 | length 238.9
  Top Layer w10: IC1.7 2948.39,2430.28 2970,2408.66 J6.5
"VBB +22V2": "P-CH 1.4" "P-CH 2.4" "P-CH 3.4" C5.1 C10.1 C15.1 C16.1 C17.1 C18.1 C19.1 C20.1 IC1.1 J4.1 R3.1 R7.1 R11.1 | length 2086.8
  Top Layer w10: C20.1@2728.94,2654.68 C20.1 ; 2830,4485 2835,4490
  Top Layer w20: J4.1@1405,3335 1405,3120 1635,2890 2445,2890 2608.24,2726.76 2623.24,2726.76 C19.1 ; C19.1@2645,2720 2661.3,2703.7 2679.92,2703.7 C20.1@2728.94,2654.68 ; C20.1 2734.92,2649.76 2745.24,2649.76 2766.56,2628.44 2793.7,2628.44 2794.84,2627.3 IC1.1
  Top Layer w40: R3.1@2120,4390 2120,4485 ; R7.1@2830,4394 2830,4485 ; R11.1@3535,4390 3535,4470.35
  other v1: 1360,3945 1410,3945 1460,3945 1360,3995 1410,3995 1460,3995 1360,4045 1410,4045 1460,4045 1360,4095 1410,4095 1460,4095 1360,4280 1410,4280 1460,4280 1360,4330 1410,4330 1460,4330 1360,4380 1410,4380 1460,4380 1360,4430 1410,4430 1460,4430 2135,4570 2185,4570 2235,4570 2285,4570 2840,4570 2890,4570 2940,4570 2990,4570 2135,4620 2185,4620 2235,4620 2285,4620 2840,4620 2890,4620 2940,4620 2990,4620 2135,4670 2185,4670 2235,4670 2285,4670 2840,4670 2890,4670 2940,4670 2990,4670 1430,4720 1480,4720 1530,4720 1580,4720 2135,4720 2185,4720 2235,4720 2285,4720 2840,4720 2890,4720 2940,4720 2990,4720 1430,4770 1480,4770 1530,4770 1580,4770 2135,4770 2185,4770 2235,4770 2285,4770 2840,4770 2890,4770 2940,4770 2990,4770 1430,4820 1480,4820 1530,4820 1580,4820 2135,4820 2185,4820 2235,4820 2285,4820 2840,4820 2890,4820 2940,4820 2990,4820 1430,4870 1480,4870 1530,4870 1580,4870 2135,4870 2185,4870 2235,4870 2285,4870 2840,4870 2890,4870 2940,4870 2990,4870
"VDD +5V": J6.7 Q1.2 | length 1074
  Top Layer w10: v1(2456.01,2683.99) 2456.01,2649.23 Q1.2
  Bottom Layer w10: v1(2456.01,2683.99) 3071.01,2683.99 J6.7

## Polygon pours and split planes (outlines as drawn)
GND on Top Layer "GND_L01_P060" (solid, pour order 60): 3390,2592.89 3409.03,2573.86 3433.15,2573.86 3450,2591.76 3450,2695.87 3433.14,2714.16 3433.14,2714.29 3408.85,2714.29 3390,2695.44
GND on Top Layer "GND_L01_P055" (solid, pour order 55): 3490,2055 3440,2005 1365,2005 1330,2040 1330,2250 1285,2295 1090,2295 1055,2330 1055,3480 1285,3480 1285,3170 1605,2850 3605,2850 3645,2810 3645,2370 3490,2215
SOURCE_LOW on Top Layer "SOURCE_LOW_L01_P018" (solid, pour order 18): 3495,3440 3510,3455 3510,3875 3645,3875 3645,3155 3610,3120 3275,3120 3265,3130 3265,3415 3290,3440
GND on Top Layer "GND_L01_P028" (solid, pour order 28): 1255,4655 1285,4625 1285,3435 1080,3435 1055,3460 1055,4625 1085,4655
NetC11_1 on Top Layer "NETC11_1_L01_P026" (solid, pour order 26): 2987.5,4235 3162.5,4235 3162.5,4266.32 2987.5,4266.32
NetC1_1 on Top Layer "NETC1_1_L01_P027" (solid, pour order 27): 1574.42,4238.85 1744.42,4238.85 1744.42,4272.4 1574.42,4272.4
SOURCE_LOW on Top Layer "SOURCE_LOW_L01_P007" (solid, pour order 7): 2085,3450 2100,3465 2100,3885 2220,3885 2220,3165 2185,3130 1855,3130 1855,3425 1880,3450
SB on Top Layer "SB_L01_P047" (solid, pour order 47): 2500,4175 2520,4195 2520,4360 2550,4390 2755,4390 2780,4365 2780,3495 2340.16,3495 2340.16,4154.39 2359.28,4175
SOURCE_LOW on Top Layer "SOURCE_LOW_L01_P017" (solid, pour order 17): 2790,3445 2805,3460 2805,3880 2940,3880 2940,3165 2900,3125 2575,3125 2555,3145 2555,3420 2580,3445
SA on Top Layer "SA_L01_P048" (solid, pour order 48): 1800,4175 1820,4195 1820,4360 1850,4390 2055,4390 2080,4365 2080,3495 1640.16,3495 1640.16,4158.5 1655.47,4175
SC on Top Layer "SC_L01_P010" (solid, pour order 10): 3210,4170 3235,4195 3235,4360 3265,4390 3470,4390 3495,4365 3495,3480 3055.16,3480 3055.16,4149.39 3074.28,4170
"VBB +22V2" on Top Layer "VBB_+22V2_L01_P000" (solid, pour order 0): 1600,4955 3470,4955 3505,4920 3505,4450 1600,4450
"VBB +22V2" on Top Layer "VBB_+22V2_L01_P046" (solid, pour order 46): 1490,4405 1535,4450 1615,4450 1615,4685 1605,4695 1495,4695
"VBB +22V2" on Top Layer "VBB_+22V2_L01_P045" (solid, pour order 45): 1320,4675.43 1310.8,4666.22 1312.02,4665 1600,4665 1600,4955 1365,4955 1320,4910
"VBB +22V2" on Top Layer "VBB_+22V2_L01_P034" (solid, pour order 34): 1320,3190.01 1499.38,3189.98 1499.38,4675.43 1320,4675.43
SOURCE_LOW on Top Layer "SOURCE_LOW_L01_P033" (solid, pour order 33): 3265,3160 3265,3045 3305,3045 3305,3160
SOURCE_LOW on Top Layer "SOURCE_LOW_L01_P032" (solid, pour order 32): 2555,3165 2555,3050 2595,3050 2595,3165
SOURCE_LOW on Top Layer "SOURCE_LOW_L01_P031" (solid, pour order 31): 1855,3165 1855,3050 1895,3050 1895,3165
NetC6_1 on Top Layer "NETC6_1_L01_P025" (solid, pour order 25): 2262.5,4240 2447.5,4240 2447.5,4273.18 2262.5,4273.18
NetC2_1 on Top Layer "NETC2_1_L01_P023" (solid, pour order 23): 1720,3160 1720,3055 1795,3055 1795,3160
NetC7_1 on Top Layer "NETC7_1_L01_P022" (solid, pour order 22): 2420,3145 2420,3050 2495,3050 2495,3145
NetC12_1 on Top Layer "NETC12_1_L01_P021" (solid, pour order 21): 3130,3135 3130,3050 3205,3050 3205,3135
SOURCE_LOW on Top Layer "SOURCE_LOW_L01_P020" (solid, pour order 20): 3585,4219.75 3585,3865 3645,3865 3645,4219.75
SOURCE_LOW on Top Layer "SOURCE_LOW_L01_P019" (solid, pour order 19): 2880,4219.75 2880,3865 2940,3865 2940,4219.75
SOURCE_LOW on Top Layer "SOURCE_LOW_L01_P016" (solid, pour order 16): 2175,4210 2175,3875 2220,3875 2220,4210
SA on Top Layer "SA_L01_P012" (solid, pour order 12): 2152.1,4165 2152.1,4070 2055,4070 2055,4165
SC on Top Layer "SC_L01_P015" (solid, pour order 15): 3567.42,4175 3565,4068.7 3471.03,4068.7 3471.03,4175
SB on Top Layer "SB_L01_P009" (solid, pour order 9): 2862.21,4175 2862.21,4075 2770,4075 2770,4175
"VBB +22V2" on Top Layer "VBB_+22V2_L01_P004" (solid, pour order 4): 2880,4430 2880,4310 2943.43,4310 2943.43,4500 2880,4500
"VBB +22V2" on Top Layer "VBB_+22V2_L01_P003" (solid, pour order 3): 2170,4410 2170,4290 2220,4290 2220,4480 2170,4480
"VBB +22V2" on Top Layer "VBB_+22V2_L01_P002" (solid, pour order 2): 3495,4450 3585,4450 3585,4330 3645,4330 3645,4600 3575,4670 3495,4750
GND on Bottom Layer "GND_L02_P050" (solid, pour order 50): 1050,2330 1085,2295 1285,2295 1330,2250 1330,2040 1365,2005 3440,2005 3490,2055 3490,2215 3645,2370 3645,2880 3610,2915 1625,2915 1500,3040 1500,3605 1475,3630 1330,3630 1290,3670 1290,4630 1265,4655 1075,4655 1050,4630
SC on Bottom Layer "SC_L02_P040" (solid, pour order 40): 3044.76,3514.97 3045.03,3514.97 3090,3470 3610,3470 3645,3505 3645,4360 3615,4390 3075,4390 3040.27,4355.27 3040.27,4339.97
"VBB +22V2" on Bottom Layer "VBB_+22V2_L02_P042" (solid, pour order 42): 3475,4955 3505,4925 3505,4740 3645,4600 3645,4480 3615,4450 1535,4450 1500,4415 1500,3690 1475,3665 1345,3665 1320,3690 1320,4915 1360,4955
SB on Bottom Layer "SB_L02_P039" (solid, pour order 39): 2335,4350 2375,4390 2820,4390 2865,4345 2865,3520 2820,3475 2390,3475 2335,3530
SA on Bottom Layer "SA_L02_P038" (solid, pour order 38): 2120,3480 2160.46,3520 2160.46,4350 2120,4390 2120,4390.46 1675,4390.46 1675,4389.28 1635.71,4350 1635.04,3525.11 1679.88,3480
SOURCE_LOW on Bottom Layer "SOURCE_LOW_L02_P036" (solid, pour order 36): 1630,3155 1665,3120 3605,3120 3645,3160 3645,3405 3610,3440 1665,3440 1630,3405

## Text inside footprints (layer, text, board x,y; h text height)
C16: Top Overlay "+" at 1468.96,4495.55 h48
C17: Top Overlay "+" at 1475.94,4170.31 h48
C18: Top Overlay "+" at 1475.94,3835.32 h48